# Altium PCB Fish_Feeder_PCB.PcbDoc
Units mm, origin at the board's own origin, x right, y up, seen from the top; angles counter-clockwise.
Board outline 75 x 85 mm, 2 copper layers (Top Layer, Bottom Layer), stack 1.1 mm thick; 28 components, 23 nets, 91 pads, 15 vias.
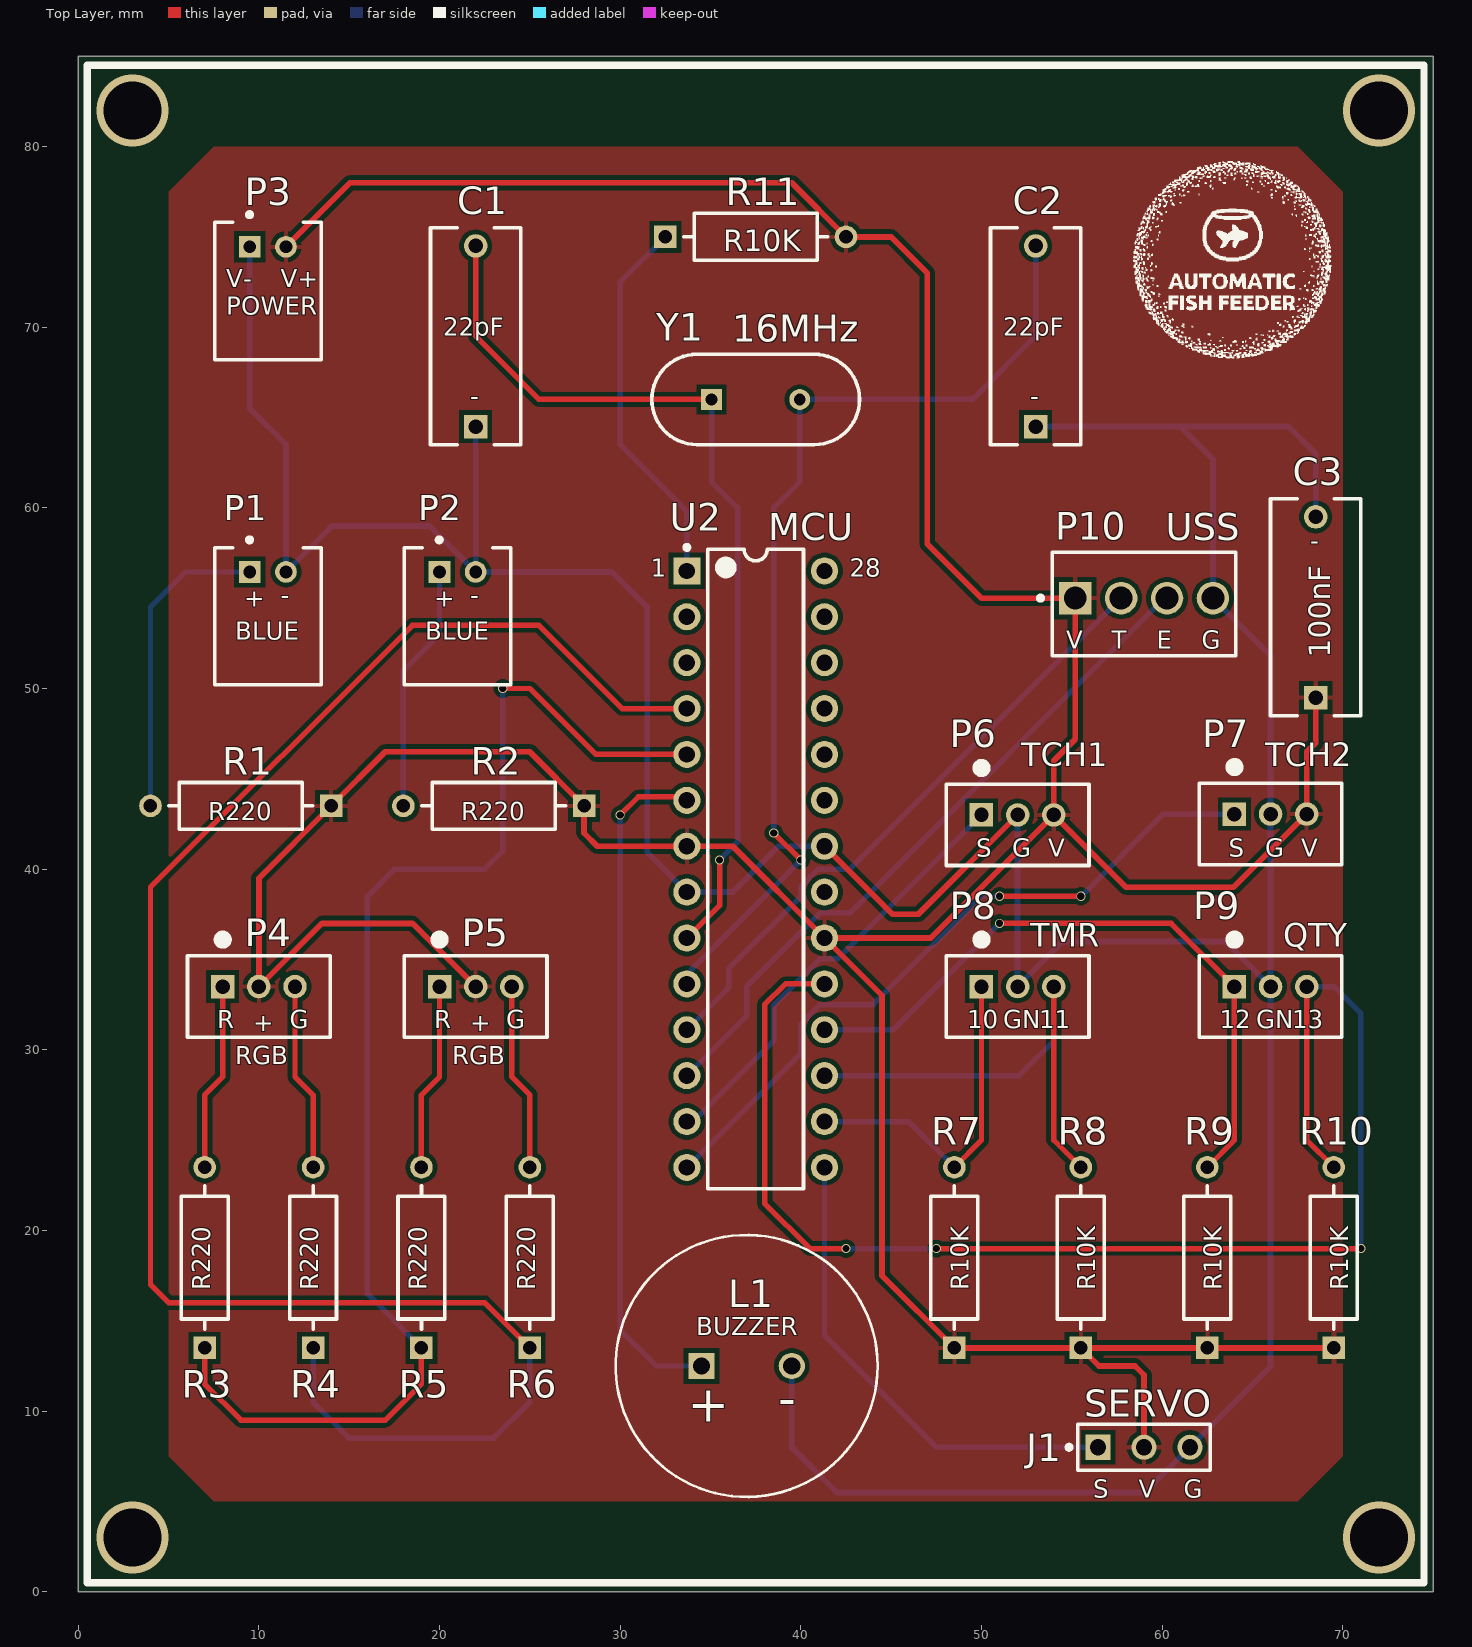
[diagram p0: Top Layer view]
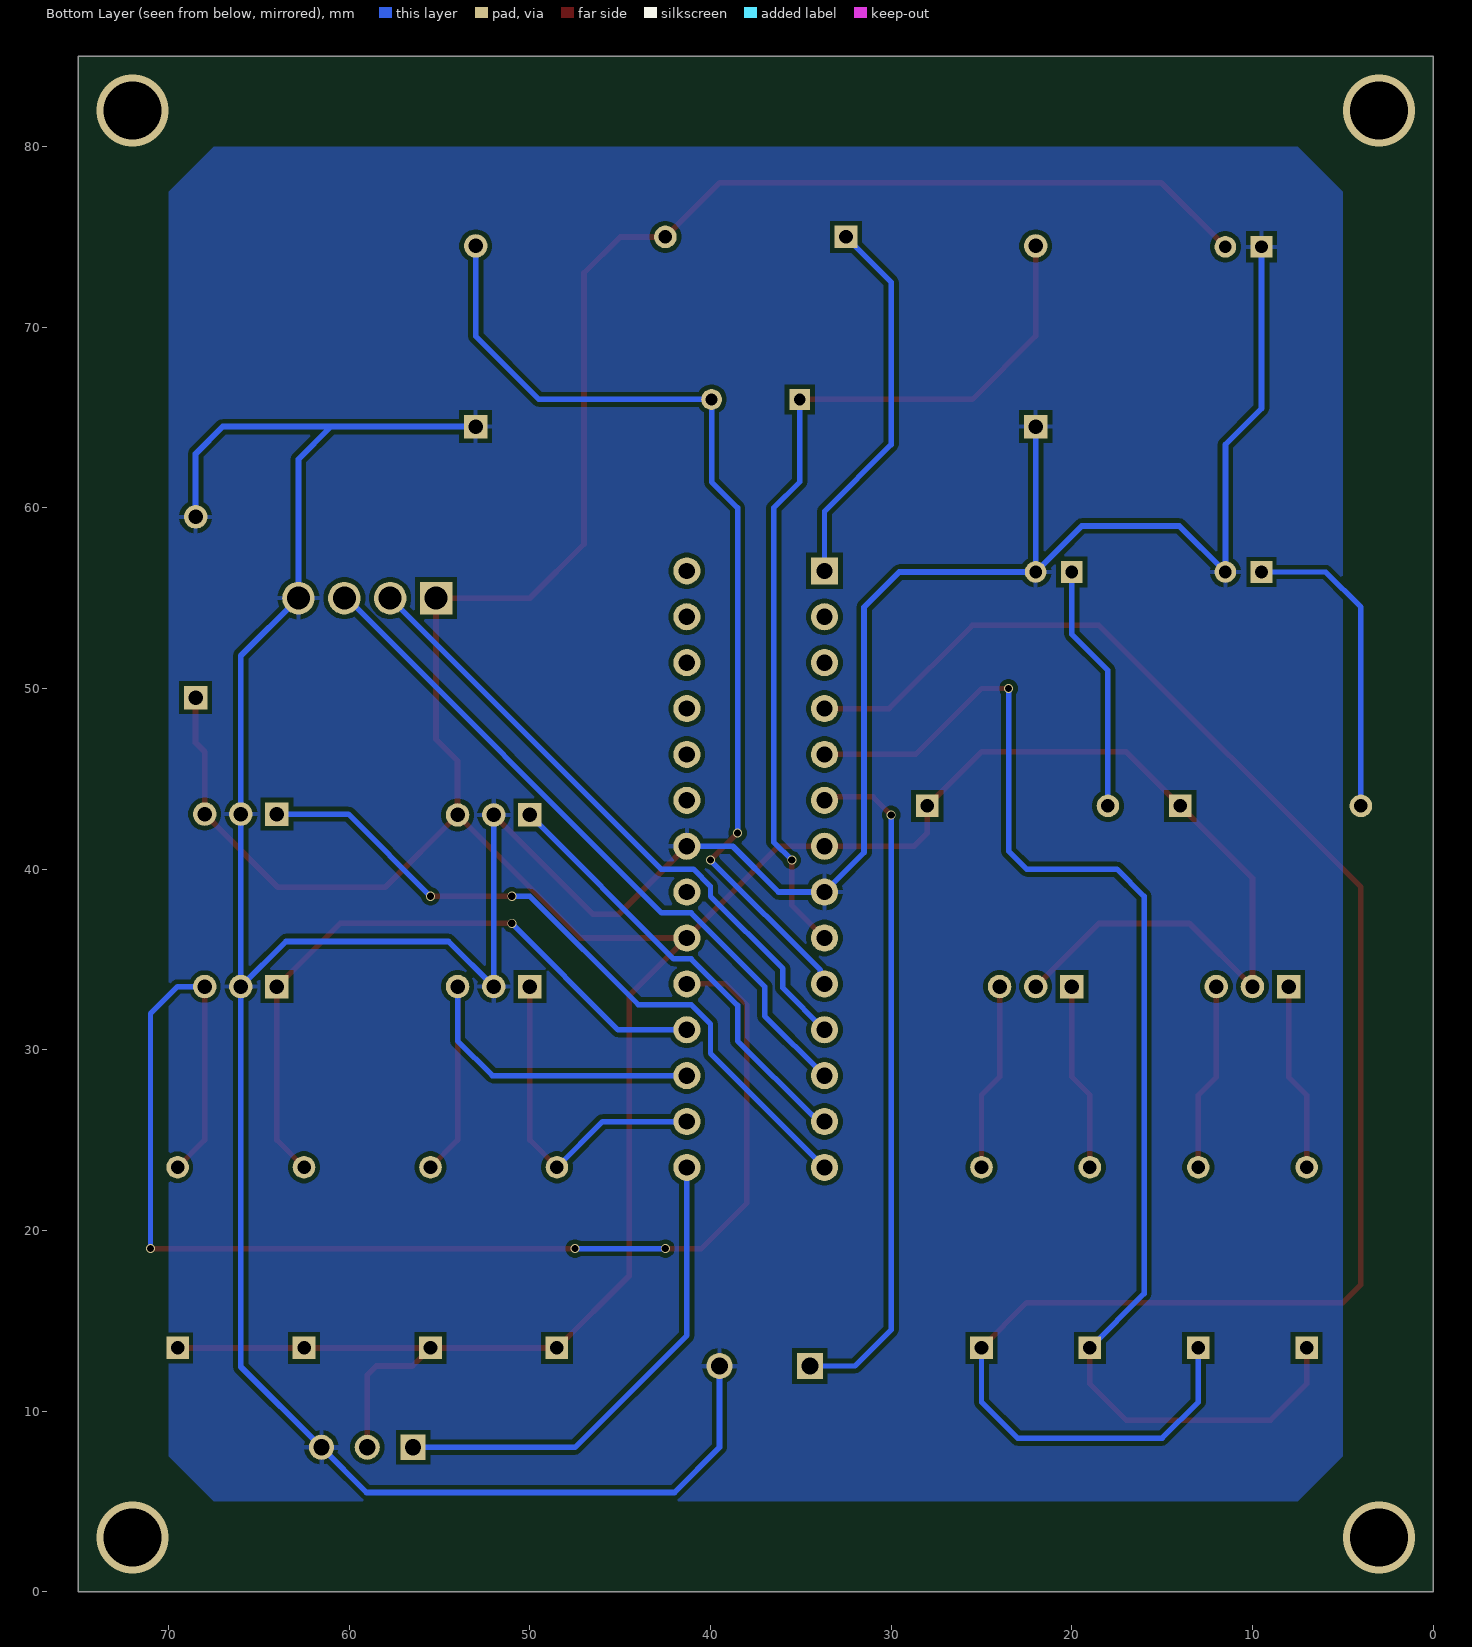
[diagram p1: Bottom Layer view, seen from below]
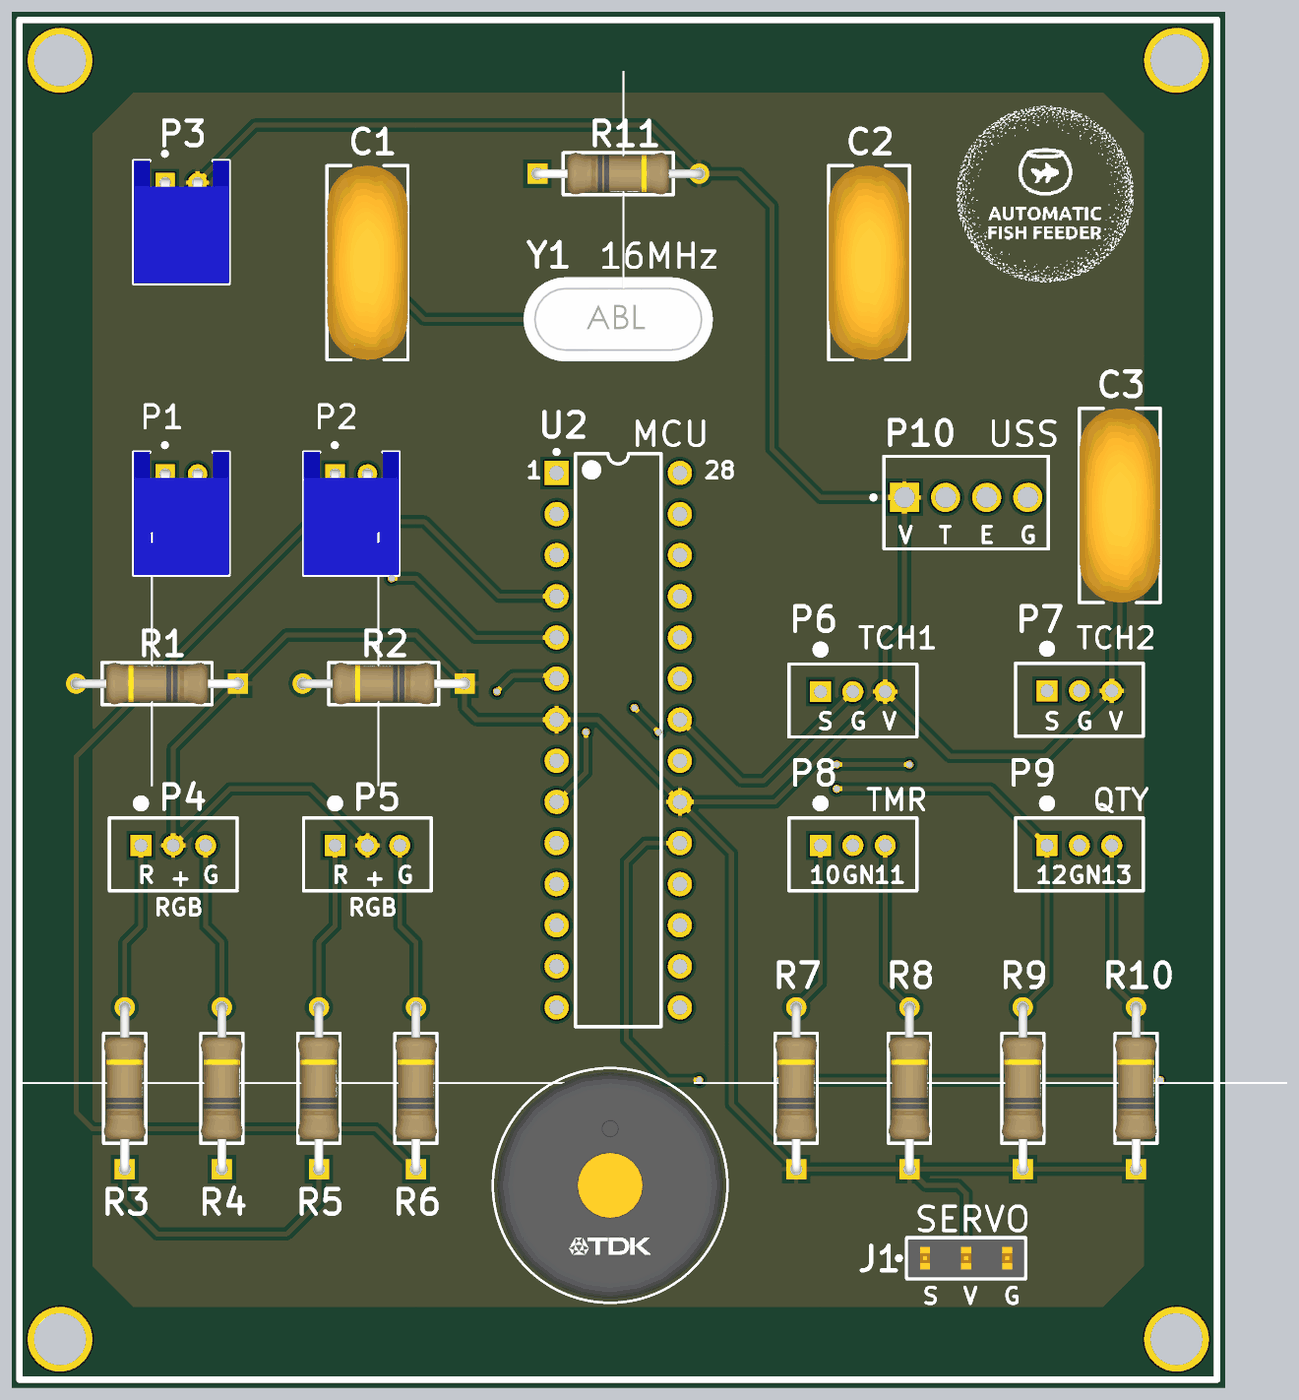
[diagram p2: 3D render of the assembled board from above, using the file's embedded part models]

## Layer stack, top to bottom
Top Solder: solder mask 0.05, SM-003, Dk 4
Top Layer: signal copper 0.1
Dielectric 1: dielectric 0.9, FR-4, Dk 4.8
Bottom Layer: signal copper 0.1
Bottom Solder: solder mask 0.05, SM-003, Dk 4

## Board outline
0,0 75,0 75,85 0,85

## Design rules (kind name [scope] priority, off if disabled: settings)
Clearance [All] p1: gap=0.25 ignorepadtopadclearanceinfootprint=FALSE
HoleSize [All] p1: absolutevalues=TRUE maxlimit=3.2 minlimit=0.025 maxpercent=80.000 minpercent=20.000
PolygonConnect [All] p1: connectstyle=Relief reliefconductorwidth=0.254 reliefentries=4 polygonreliefangle="90 Angle" airgapwidth=0.254
RoutingVias [All] p1: holewidth=0.4 width=0.5 viastyle="Through Hole" minholewidth=0.4 minwidth=0.5 maxholewidth=0.4 maxwidth=0.5
SilkToSilkClearance [All] p1: silktosilkclearance=0.1
SilkToSolderMaskClearance [IsPad] p1: minsilkscreentomaskgap=0.1 clearancetoexposedcopper=TRUE
SolderMaskExpansion [All] p1: expansion=0.102 istentingtop=FALSE
Width Width_POW [(InNet('VCC') OR InNet('GND'))] p1: maxlimit=0.32 minlimit=0.3 preferedwidth=0.32
Width [All] p2: maxlimit=0.5 minlimit=0.25 preferedwidth=0.3
27 further rules are at their usual default settings.

## Components (designator, comment, footprint, x,y, rotation, side; value= is the part's Value field where it differs from the comment)
C1 "22pF" FP-VY1470-MFG 22,69.5 r90 top
C2 "22pF" FP-VY1470-MFG 53,69.5 r90 top
C3 "100nF" FP-VY1470-MFG 68.5,54.5 r90 top
J1 "SERVO_HEADER" FP-87224-3-MFG 59,8 r0 top
L1 "Buzzer" FP-PS1440P02BT-MFG 37,12.5 r0 top
P1 "BLULED1 JST" JST-S2B-PH-K-S_V 10.5,54 r0 top
P2 "BLULED2 JST" JST-S2B-PH-K-S_V 21,54 r0 top
P3 "POWER JST" JST-S2B-PH-K-S_V 10.5,72 r0 top
P4 "RGB1 JST" JST-B3B-PH-K-S-3_V 10,32.95 r0 top
P5 "RGB2 JST" JST-B3B-PH-K-S-3_V 22,32.95 r0 top
P6 "TCH1 JST" JST-B3B-PH-K-S-3_V 52,42.45 r0 top
P7 "TCH2 JST" JST-B3B-PH-K-S-3_V 66,42.5 r0 top
P8 "TMR JST" JST-B3B-PH-K-S-3_V 52,32.95 r0 top
P9 "QTY JST" JST-B3B-PH-K-S-3_V 66,32.95 r0 top
P10 "USS_Header" TECO-640456-4 59,55 r180 top
R1 "220Ohm" FP-CFR-25-MFG 9,43.5 r180 top
R2 "220Ohm" FP-CFR-25-MFG 23,43.5 r180 top
R3 "220Ohm" FP-CFR-25-MFG 7,18.5 r90 top
R4 "220Ohm" FP-CFR-25-MFG 13,18.5 r90 top
R5 "220Ohm" FP-CFR-25-MFG 19,18.5 r90 top
R6 "220Ohm" FP-CFR-25-MFG 25,18.5 r90 top
R7 "10kOhm" FP-CFR-25-MFG 48.5,18.5 r90 top
R8 "10kOhm" FP-CFR-25-MFG 55.5,18.5 r90 top
R9 "10kOhm" FP-CFR-25-MFG 62.5,18.5 r90 top
R10 "10kOhm" FP-CFR-25-MFG 69.5,18.5 r90 top
R11 "10kOhm Reset" FP-CFR-25-MFG 37.5,75 r0 top
U2 "ATmega328-PU" 28P3 37.5,40 r0 top
Y1 "16MHz Crystal" FP-ABL-MFG 37.5,66 r0 top

## Footprints (in the part's own frame and the unit in brackets; to place one, negate y for a bottom-side part, rotate by r counter-clockwise, add the part's x,y. Pads: shape width x height; smd on the part's side, far side on the other; paste and mask are expansions set on the pad)
28P3 [mm] "28-Pin Plastic Dual In-Line Package (PDIP)"
  rect 1.5x1.5 hole 0.9: 1(-3.81,16.51)
  round 1.5 hole 0.9: 2(-3.81,13.97) 3(-3.81,11.43) 4(-3.81,8.89) 5(-3.81,6.35) 6(-3.81,3.81) 7(-3.81,1.27) 8(-3.81,-1.27) 9(-3.81,-3.81) 10(-3.81,-6.35) 11(-3.81,-8.89) 12(-3.81,-11.43) 13(-3.81,-13.97) 14(-3.81,-16.51) 15(3.81,-16.51) 16(3.81,-13.97) 17(3.81,-11.43) 18(3.81,-8.89) 19(3.81,-6.35) 20(3.81,-3.81) 21(3.81,-1.27) 22(3.81,1.27) 23(3.81,3.81) 24(3.81,6.35) 25(3.81,8.89) 26(3.81,11.43) 27(3.81,13.97) 28(3.81,16.51)
  silkscreen extent -3.93,-17.7 2.65,17.93, body extent -3.6,-17.65 3.6,17.65, height 4.58
FP-87224-3-MFG [mil]
  rect 54.69x54.69 hole 35 paste-39370.1 mask+0: 1(-100,0)
  round 54.69 hole 35 paste-39370.1 mask+0: 2(0,0) 3(100,0)
  silkscreen extent -168,-50 145,50, body extent -148,-54 148,54, height 10
FP-ABL-MFG [mm]
  rect 1.15x1.15 hole 0.65 paste-1000 mask+0: 1(-2.44,0)
  round 1.15 hole 0.65 paste-1000 mask+0: 2(2.44,0)
  silkscreen extent -5.75,-2.5 5.75,2.5, body extent -5.85,-2.6 5.85,2.6, height 0.25
FP-CFR-25-MFG [mm]
  rect 1.25x1.25 hole 0.75 paste-1000 mask+0: 1(-5,0)
  round 1.25 hole 0.75 paste-1000 mask+0: 2(5,0)
  silkscreen extent -3.98,-1.3 3.98,1.3, body extent -5.72,-1.4 5.72,1.4, height 0.25
FP-PS1440P02BT-MFG [mm]
  rect 1.45x1.45 hole 0.95 paste-1000 mask+0: 1(-2.5,0)
  round 1.45 hole 0.95 paste-1000 mask+0: 2(2.5,0)
  silkscreen extent -7.25,-7.25 7.25,7.25, body extent -7.35,-7.35 7.35,7.35, height 0.25
FP-VY1470-MFG [mm]
  rect 1.3x1.3 hole 0.8 paste-1000 mask+0: 1(-5,0)
  round 1.3 hole 0.8 paste-1000 mask+0: 2(5,0)
  silkscreen extent -6,-2.5 6,2.5, body extent -6.1,-2.6 6.1,2.6, height 0.25
JST-B3B-PH-K-S-3_V [mm] "Connector, 3-Leads, Body 7.9x4.5mm, Pitch 2mm"
  rect 1.3x1.3 hole 0.8: 1(-2,0.55)
  round 1.3 hole 0.8: 2(0,0.55) 3(2,0.55)
  silkscreen extent -3.95,-2.25 3.95,3.4, body extent -3.95,-2.25 3.95,2.25, height 6
JST-S2B-PH-K-S_V [mm] "THD, 2-Leads, Body 7.6x5.9mm, Pitch 2mm"
  rect 1.2x1.2 hole 0.7: 1(-1,2.45)
  round 1.2 hole 0.7: 2(1,2.45)
  silkscreen extent -2.95,-3.8 2.95,4.35, body extent -2.95,-3.8 2.95,3.8, height 4.8
TECO-640456-4 [mm] "Through Hole, 4-Leads, Body 10.16x5.72mm, Pitch 2.54mm"
  rect 1.8x1.8 hole 1.27 paste+0: 1(3.81,0)
  round 1.8 hole 1.27 paste+0: 2(1.27,0) 3(-1.27,0) 4(-3.81,0)
  silkscreen extent -5.08,-2.54 5.86,3.18, body extent -5.08,-2.54 5.08,3.18, height 10.03

## Part data
C1 C2 C3: library part CMP-02417-000069-1, "CAP CER 2200PF 760VAC Y5U RADIAL", Capacitance=2.2nF, Case/Package=Radial, Dielectric=Y5U, Max Operating Temperature=125°C, Min Operating Temperature=-40°C, Package Quantity=500, Ratings=X1, Resistor Type=Ceramic, Tolerance=20%, Voltage=500V, Construction=RADIAL, Contact Plating=Tin, Depth=5mm, Diameter=12mm, Height=15mm, Height - Seated (Max)=0.63inch, Lead Diameter=0.6mm, Lead Free="Lead Free", Lead Pitch=10mm, Lead/Base Style=Kinked, Mount="Through Hole", Packaging="Tape and Reel", Radiation Hardening=No, RoHS Compliant=Yes, Series=VY1, Termination=Radial, Thickness=5mm, Voltage Rating (AC)=500V, Voltage Rating (DC)=500V, Width=5mm
J1: library part CMP-2000-05697-2, "CONN HEADER VERT 3POS 2.54MM", Color=Black, Contact Current Rating=3A, Flammability Rating="UL94 V-0", High Temperature Housing=No, Max Operating Temperature=105°C, Min Operating Temperature=-65°C, Package Quantity=520, Approvals=CSA, Board Standoff="No (Without)", Connector Type=Plug, Contact Gender=Male, Contact Material=Bronze, Contact Mating Length=8.08mm, Contact Plating=Gold, Contact Post Length=0.125inch, Contact Protection="No (Without)", Contact Shape=Square, Contact Type="Male Pin", Current Rating=3A, Depth=2.54mm, ELV=Compliant, Gasket="No (Without)", High Speed Serial Data Connector=No, Housing Color=Black, Housing Material=Thermoplastic, Keyed=No, Lead Free="Lead Free", Length=7.21mm, Mating Alignment="No (Without)", Mating Connector Lock="No (Without)", Mount="Through Hole", Number of Contacts=3, Number of Positions=3, Number of Rows=1, Orientation=Straight, Packaging=Carton, PCB Mount Retention=Without, PCB Mounting Orientation=Vertical, PCB Thickness=1.397mm, Pitch=2.54mm, Radiation Hardening=No, RoHS Compliant=Yes, Row Spacing=2.54mm, Selectively Loaded="No (Without)", Series="AMPMODU MOD II", Stabilizers="No (Without)", Strain Relief="No (Without)", Termination="Through Hole"
L1: library part CMP-08413-000003-1, "AUDIO PIEZO TRANSDUCER 30V TH", Frequency=4kHz, Max Operating Temperature=70°C, Min Operating Temperature=-10°C, Operating Supply Voltage=3V, Package Quantity=350, Diameter=14mm, Height=8mm, Lead Free="Lead Free", Mount="Through Hole", Number of Terminals/Pins=2, Packaging="Tape and Reel", RoHS Compliant=Yes, Self Resonant Frequency=4kHz, Termination="PC Pins", Voltage Rating (DC)=3V, Washable=No
P1 P2 P3: library part CMP-1755-00004-1, "Male Header, Pitch 2 mm, 1 x 2 Position, Height 4.8 mm, Tail Length 3.4 mm, -25 to 85 degC, RoHS, Bulk", Capacitance="10 uF", Case\Package=Radial, Max Operating Temperature="85 degC", Min Operating Temperature="-40 degC", Package Quantity=200, Tolerance=20%, Voltage Rating="50 V", ComponentLink1Description=Datasheet, ComponentLink1URL=http://www.jst-mfg.com/product/pdf/eng/ePH.pdf, DatasheetVersion=Dec-12, Diameter="5 mm", Height="11 mm", Lead Pitch="2 mm", Length="11 mm", Mount="Through Hole", PackageDescription="Male Header, Pitch 2 mm, 1 x 2 Position, Height 4.8 mm, Tail Length 3.4 mm", PackageReference=S2B-PH-K-S, Packaging=Bulk, Pins=2, Radiation Hardening=No, REACH SVHC="No SVHC", RoHSCompliant=true, Voltage Rating (DC)="50 V"
P4 P5 P6 P7 P8 P9: library part CMP-2000-05164-1, "Male Header, Pitch 2 mm, 1 x 3 Position, Height 6 mm, Tail Length 3.4 mm, -25 to 85 degC, RoHS, Bulk", Manufacturer=JST, Datasheet URL=https://datasheet.ciiva.com/11746/0900766b80826550-11746939.pdf, Datasheet Version=Oct-06, Manufacturer URL=http://www.jst.com/home2.html, No of Positions=3, Pitch=2mm, Style/Orientation=StraightHeader/Plug, Termination=Crimp, Type=ShroudedHeader
P10: library part CMP-2000-05419-1, "Male Header, Pitch 2.54 mm, 1 x 4 Position, Height 10.03 mm, Tail Length 3.56 mm, RoHS, Bulk", Color=White, Current, Rating="5 /  / A", Flammability Rating=UL94V-0, Manufacturer="TE Connectivity", Temperature, Operating="-55to+105 /  / degC", Voltage, Rating="250 /  / V", Agency Approvals=CSA,UL, Angle=Straight, Brand/Series=MTA-100Series, Color, Housing=White, Connector Type=MTA-100, Contact Centerline Spacing="0.100 /  / in.", Contact Mating Area Plating=Tin, Contact Plating=Tin, Contact Shape=Square, Contact Termination Area Plating=Tin, Datasheet URL=https://datasheet.ciiva.com/16286/eng-ds-82056-mta-0608-16286228.pdf, Datasheet Version=Dec-14, Length, Overall="0.4 /  / \"", Length, Pin="0.14 /  / \"", Length, Terminal Post="0.14 /  / in.", Manufacturer URL=http://www.te.com/, Material, Contact=CopperAlloy, Material, Housing=Polyester, Mount Angle=Vertical, Mounting Hole Size="0.04 /  / \"", Mounting Type=PCMount, Number of Contacts=4, Number of Positions=4, Number of Rows=1, Pin Spacing="0.1 /  / \"", Primary Type=InterconnectSystem, Size, Post="0.025 /  / in.", Special Features=Pinstrip, Standards=RoHSCompliant,ELVCompliant,UL94V-0, Termination=Solder, Type=PCBPlug
R1 R2 R3 R4 R5 R6 R7 R8 R9 R10 R11: library part CMP-03413-000009-1, "RES 10 OHM 1/4W 5% AXIAL", Case/Package=Axial, Max Operating Temperature=155°C, Max Power Dissipation=250mW, Min Operating Temperature=-55°C, Package Quantity=200, Resistance=10R, Resistor Type="Carbon Film", Temperature Coefficient=500ppm/°C, Tolerance=5%, Length=0.248inch, Number of Terminations=2, Packaging=Bulk, RoHS Compliant=Yes, Series="Carbon Film"
U2: library part CMP-0095-00015-2, "8-bit AVR Microcontroller, 32KB Flash, 1KB EEPROM, 2KB SRAM, 28-pin PDIP, Industrial Grade (-40°C to 85°C)", ComponentLink1Description="Manufacturer URL", ComponentLink1URL=http://www.atmel.com/, ComponentLink2Description="ATmega48A/48PA/88A/88PA/168A/168PA/328/328P Datasheet", ComponentLink2URL=http://www.atmel.com/dyn/resources/prod_documents/8271.pdf, ComponentLink3Description="ATmega48A/48PA/88A/88PA/168A/168PA/328/328P Summary", ComponentLink3URL=http://www.atmel.com/dyn/resources/prod_documents/8271S.pdf, DatasheetVersion="revD, May-2011", PackageDescription="28-lead (0.300\"/7.62mm Wide) Plastic Dual Inline Package (PDIP)", PackageReference=28P3, PackageVersion="revB, Sep-2001", RevisionNote="DatasheetVersion updated. URLs added."
Y1: library part CMP-27762-002521-1, "CRYSTAL 16.0000MHZ 18PF TH", Capacitance=1.8E-11F, ESR (Equivalent Series Resistance)=40R, Frequency=16MHz, Frequency Stability=30ppm, Load Capacitance=18pF, Max Operating Temperature=70°C, Min Operating Temperature=-20°C, Package Quantity=200, Height=3.5mm, Length=11.5mm, Packaging=Bulk, Termination=Radial, Tolerance=30ppm, Width=5mm

## Via types
v1: diameter 0.5, hole 0.4, Top Layer to Bottom Layer, 11 vias
v2: diameter 4, hole 3.2, Top Layer to Bottom Layer, 4 vias

## Nets (pads, with @x,y where several pads share a name; then routed paths per layer and width w, separated by ;. In a path a pad name is that pad's centre, name@x,y a point inside that pad or via, vN(x,y) a via of type N, cw(c..) or ccw(c..) an arc to the next point about the centre after c; other vN are vias at no path point)
GND: C1.1 C2.1 C3.2 J1.3 L1.2 P1.2 P2.2 P3.1 P6.2 P7.2 P8.2 P9.2 P10.4 U2.8 U2.22 | length 223.9
  Top Layer w0.32: U2.22 45.08,37.5 46.5,37.5 P6.2
  Bottom Layer w0.32: P3.1 9.5,65.5 11.5,63.5 P1.2 14.05,59 19.45,59 P2.2 ; C1.1 P2.2 ; L1.2 39.5,8 42,5.5 59.04,5.5 J1.3 66,12.46 P9.2 ; U2.22 38.77,41.27 36.23,38.73 U2.8 31.5,40.92 31.5,54.5 29.55,56.45 P2.2 ; P6.2 P8.2 54.5,36 63.5,36 P9.2 ; C2.1 61,64.5 ; C3.2 68.5,63 67,64.5 61,64.5 ; 61,64.5 62.81,62.69 P10.4 66,51.81 P7.2 P9.2
NetC1_2: C1.2 U2.9 Y1.1 | length 51.1
  Top Layer w0.3: C1.2 22,69.5 25.5,66 Y1.1 ; U2.9 35.5,38 v1(35.5,40.5)
  Bottom Layer w0.3: Y1.1 35.06,61.44 36.5,60 36.5,41.5 v1(35.5,40.5)
NetC2_2: C2.2 U2.10 Y1.2 | length 55.7
  Top Layer w0.3: v1(38.5,42) v1(40,40.5)
  Bottom Layer w0.3: U2.10 33.92,33.88 33.92,34.42 v1@39.992,40.492 ; v1(38.5,42) 38.5,60 39.94,61.44 Y1.2 49.5,66 53,69.5 C2.2
NetJ1_1: J1.1 U2.15 | length 27
  Bottom Layer w0.3: U2.15 41.31,14.19 47.5,8 J1.1
NetL1_1: L1.1 U2.6 | length 38
  Top Layer w0.3: v1(30,43) 31,44 33.5,44 U2.6
  Bottom Layer w0.3: v1(30,43) 30,14.5 32,12.5 L1.1
NetP1_1: P1.1 R1.2 | length 17.3
  Bottom Layer w0.3: R1.2 4,54.5 5.95,56.45 P1.1
NetP2_1: P2.1 R2.2 | length 13.8
  Bottom Layer w0.3: R2.2 18,51 20,53 P2.1
NetP4_1: P4.1 R3.2 | length 10.4
  Top Layer w0.3: R3.2 7,27.5 8,28.5 P4.1
NetP4_3: P4.3 R4.2 | length 10.4
  Top Layer w0.3: P4.3 12,28.5 13,27.5 R4.2
NetP5_1: P5.1 R5.2 | length 10.4
  Top Layer w0.3: R5.2 19,27.5 20,28.5 P5.1
NetP5_3: P5.3 R6.2 | length 10.4
  Top Layer w0.3: P5.3 24,28.5 25,27.5 R6.2
NetP6_1: P6.1 U2.13 | length 24.5
  Bottom Layer w0.3: U2.13 34.015,26.03 34.393,26.409 34.409,26.409 38.5,30.5 38.5,32.466 41.074,35.04 42.04,35.04 P6.1
NetP7_1: P7.1 U2.14 | length 39.4
  Top Layer w0.3: v1(51,38.5) v1(55.5,38.5)
  Bottom Layer w0.3: U2.14 40,29.8 40,31.426 41.074,32.5 44,32.5 50,38.5 v1(51,38.5) ; v1(55.5,38.5) 60.05,43.05 P7.1
NetP8_1: P8.1 R7.2 U2.16 | length 18.9
  Top Layer w0.3: R7.2 50,25 P8.1
  Bottom Layer w0.3: U2.16 45.97,26.03 R7.2
NetP8_3: P8.3 R8.2 U2.17 | length 27.1
  Top Layer w0.3: P8.3 54,25 R8.2
  Bottom Layer w0.3: U2.17 52.07,28.57 54,30.5 P8.3
NetP9_1: P9.1 R9.2 U2.18 | length 37.2
  Top Layer w0.3: v1(51,37) 60.5,37 P9.1 64,25 R9.2
  Bottom Layer w0.3: U2.18 45.11,31.11 v1(51,37)
NetP9_3: P9.3 R10.2 U2.19 | length 76.1
  Top Layer w0.3: U2.19 39.15,33.65 38,32.5 38,21.5 40.5,19 v1(42.5,19) ; v1(47.5,19) v1(71,19) ; P9.3 68,25 R10.2
  Bottom Layer w0.3: v1(42.5,19) v1(47.5,19) ; P9.3 69.5,33.5 71,32 v1(71,19)
NetP10_2: P10.2 U2.11 | length 34.9
  Bottom Layer w0.3: U2.11 36,33.42 36,34.5 40,38.5 40,39.046 40.954,40 42.73,40 P10.2
NetP10_3: P10.3 U2.12 | length 38.5
  Bottom Layer w0.3: U2.12 37,31.88 37,33.506 41.074,37.58 42.714,37.58 60.134,55 P10.3
NetR3_1: R3.1 R5.1 U2.5 | length 73.1
  Top Layer w0.3: R3.1 7,11.5 9,9.5 17,9.5 19,11.5 R5.1 ; v1(23.5,50) 25,50 28.65,46.35 U2.5
  Bottom Layer w0.3: R5.1 16,16.5 16,38.5 17.5,40 22.5,40 23.5,41 v1(23.5,50)
NetR4_1: R4.1 R6.1 U2.4 | length 101.7
  Top Layer w0.3: R6.1 22.5,16 5,16 4,17 4,39 18.5,53.5 25.5,53.5 30.11,48.89 U2.4
  Bottom Layer w0.3: R4.1 13,10.5 15,8.5 23,8.5 25,10.5 R6.1
NetR11_1: R11.1 U2.1 | length 21.1
  Bottom Layer w0.3: R11.1 30,72.5 30,63.5 33.69,59.81 U2.1
VCC: C3.1 J1.2 P3.2 P4.2 P5.2 P6.3 P7.3 P10.1 R1.1 R2.1 R7.1 R8.1 R9.1 R10.1 R11.2 U2.7 U2.20 | length 230.5
  Top Layer w0.32: P3.2 15.05,78 39.5,78 R11.2 45,75 47,73 47,58 50,55 P10.1 55.19,47.19 54,46 P6.3 ; P5.2 18.5,37 13.5,37 P4.2 10,39.5 R1.1 17,46.5 25,46.5 R2.1 28,42 28.73,41.27 U2.7 36.23,41.27 U2.20 ; J1.2 59,12 58.5,12.5 56.5,12.5 R8.1 ; C3.1 68.5,47 68,46.5 P7.3 63.95,39 58,39 P6.3 ; R10.1 R9.1 R8.1 ; U2.20 47.19,36.19 P6.3 ; U2.20 44.5,33 44.5,17.5 R7.1 R8.1
pads on no net: U2.2 U2.3 U2.21 U2.23 U2.24 U2.25 U2.26 U2.27 U2.28
copper on no net:
  other v2: 3,3 72,3 3,82 72,82

## Polygon pours and split planes (outlines as drawn)
VCC on Top Layer "VCC_L01_P000" (solid, remove dead copper, pour order 0): 7.5,80 5,77.5 5,7.5 7.5,5 67.5,5 70,7.5 70,77.5 67.5,80
GND on Bottom Layer "GND_L02_P001" (solid, remove dead copper, pour order 1): 7.5,80 5,77.5 5,7.5 7.5,5 67.5,5 70,7.5 70,77.5 67.5,80

## Silkscreen, mask and mechanical layers (free items; w line width, h text height)
Top Overlay:
  drawing of 618 lines, arcs and shapes, not listed
  text "R10K" at 35.7,74.2 h1.2
  text "V-" at 8.2,72.2 h1
  text "V+" at 11.2,72.2 h1
  text "POWER" at 8.2,70.7 h1
  text "22pF" at 20.2,69.533 h1
  text "22pF" at 51.2,69.533 h1
  text "16MHz" at 36.2,69.2 h1.5
  text "-" at 21.7,65.7 h1
  text "-" at 52.7,65.7 h1
  text "MCU" at 38.2,58.2 h1.5
  text "USS" at 60.2,58.2 h1.5
  text "-" at 68.2,57.7 h1
  text "1" at 31.7,56.2 h1
  text "28" at 42.7,56.2 h1
  text "-" at 11.2,54.7 h1
  text "-" at 21.7,54.7 h1
  text "+" at 9.2,54.533 h1
  text "+" at 19.7,54.533 h1
  text "BLUE" at 8.7,52.7 h1
  text "BLUE" at 19.2,52.7 h1
  text "V" at 54.7,52.2 h1
  text "T" at 57.2,52.2 h1
  text "E" at 59.7,52.2 h1
  text "G" at 62.2,52.2 h1
  text "100nF" at 69.3,51.7 h1.2 r90
  text "TCH1" at 52.2,45.7 h1.3
  text "TCH2" at 65.7,45.7 h1.3
  text "R220" at 7.2,42.7 h1
  text "R220" at 21.2,42.7 h1
  text "S" at 49.7,40.7 h1
  text "G" at 51.7,40.7 h1
  text "V" at 53.7,40.7 h1
  text "S" at 63.7,40.7 h1
  text "G" at 65.7,40.7 h1
  text "V" at 67.7,40.7 h1
  text "TMR" at 52.7,35.7 h1.3
  text "QTY" at 66.7,35.7 h1.3
  text "R" at 7.7,31.2 h1
  text "G" at 11.7,31.2 h1
  text "R" at 19.7,31.2 h1
  text "G" at 23.7,31.2 h1
  text "10" at 49.2,31.2 h1
  text "GN" at 51.2,31.2 h1
  text "11" at 53.2,31.2 h1
  text "12" at 63.2,31.2 h1
  text "GN" at 65.2,31.2 h1
  text "13" at 67.2,31.2 h1
  text "+" at 9.7,31.033 h1
  text "+" at 21.7,31.033 h1
  text "RGB" at 8.7,29.2 h1
  text "RGB" at 20.7,29.2 h1
  text "R220" at 7.3,16.7 h1 r90
  text "R220" at 13.3,16.7 h1 r90
  text "R220" at 19.3,16.7 h1 r90
  text "R220" at 25.3,16.7 h1 r90
  text "R10K" at 49.3,16.7 h1 r90
  text "R10K" at 56.3,16.7 h1 r90
  text "R10K" at 63.3,16.7 h1 r90
  text "R10K" at 70.3,16.7 h1 r90
  text "BUZZER" at 34.2,14.2 h1
  text "-" at 38.75,9.75 h2
  text "SERVO" at 55.7,9.7 h1.5
  text "+" at 33.75,9.417 h2
  text "S" at 56.2,5.2 h1
  text "V" at 58.7,5.2 h1
  text "G" at 61.2,5.2 h1